# Altium PCB Pcb.PcbDoc
Units mm, origin at the board's own origin, x right, y up, seen from the top; angles counter-clockwise.
Board outline 60 x 69 mm, 2 copper layers (Top Layer, Bottom Layer), stack 1.98 mm thick; 15 components, 9 nets, 50 pads, 3 vias.
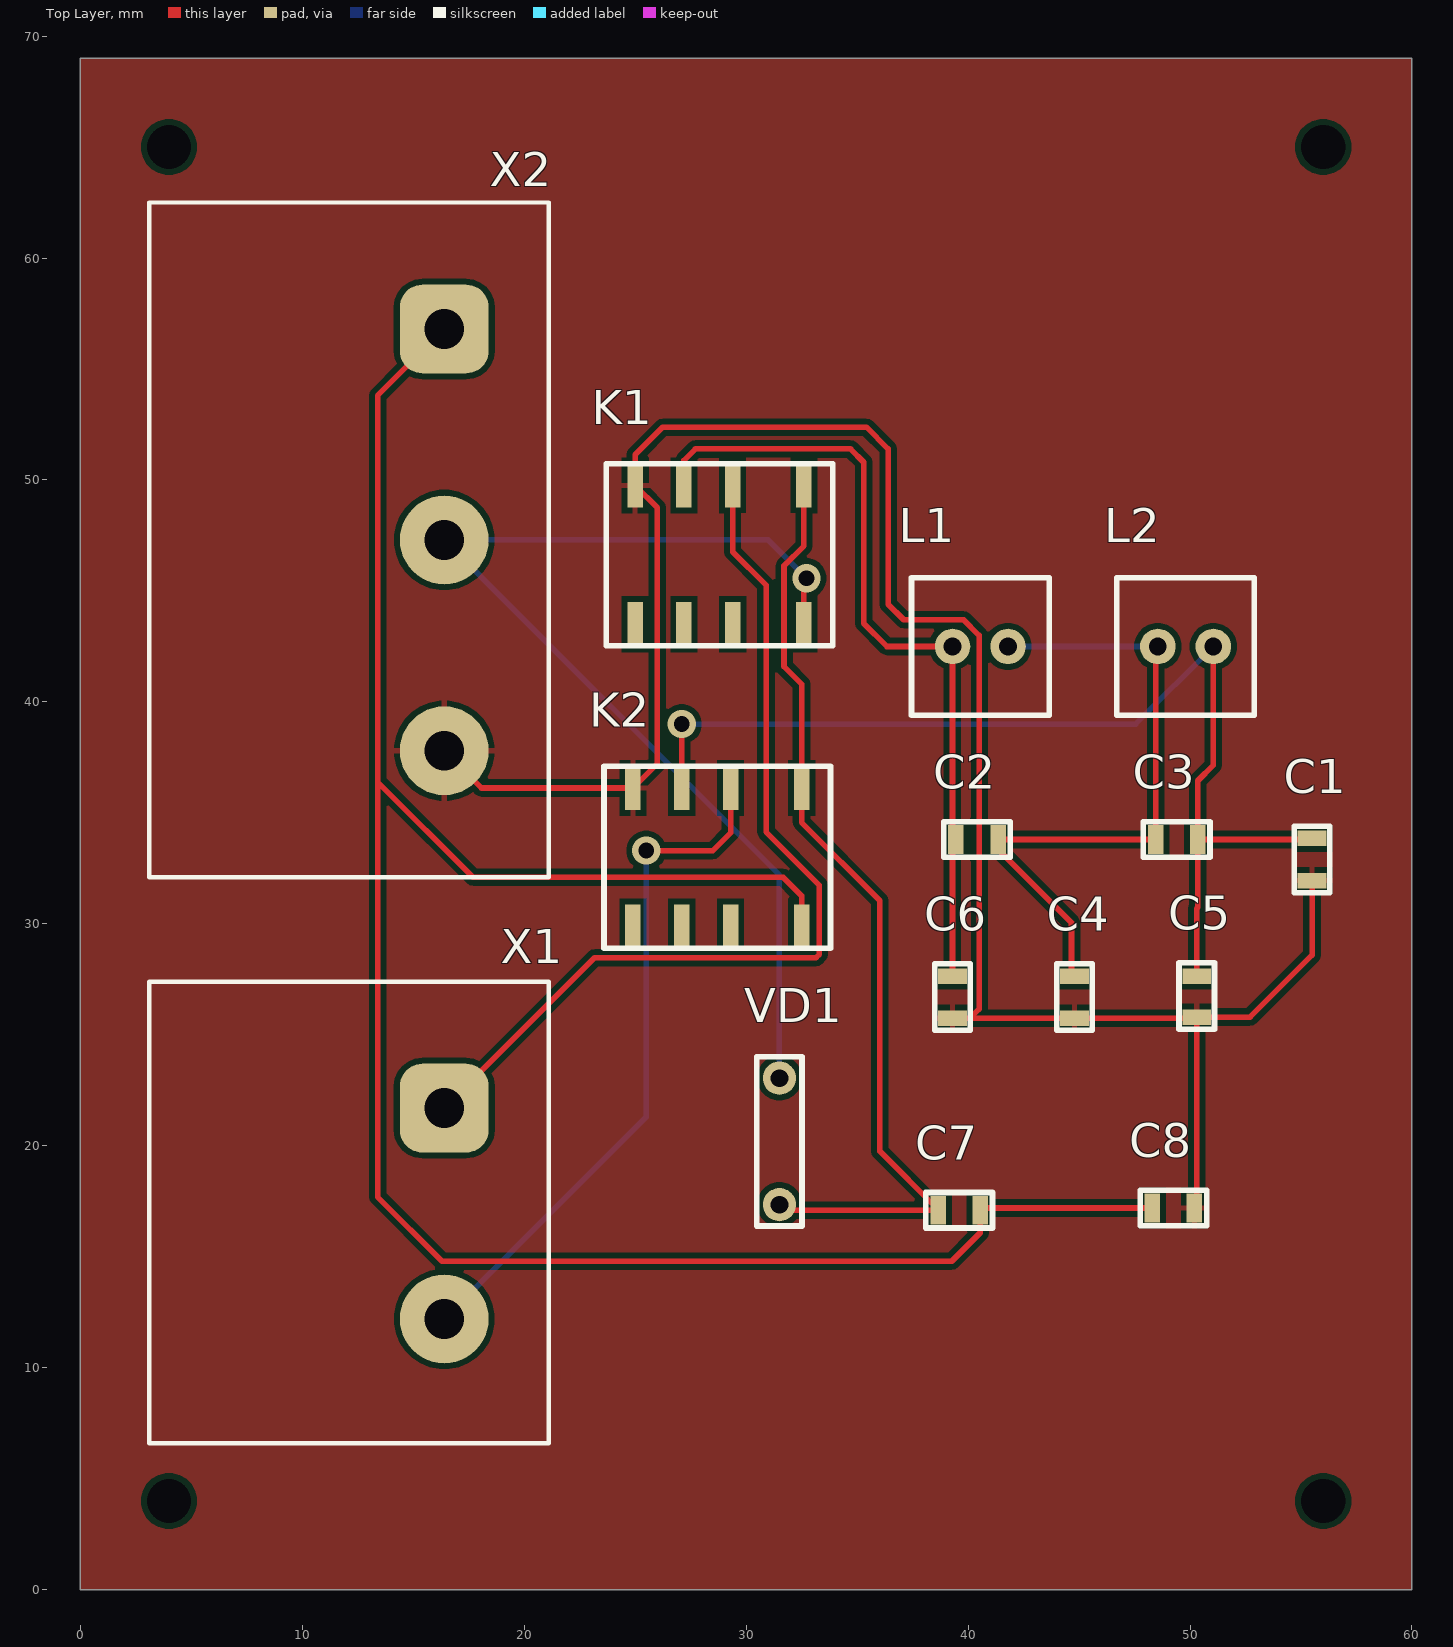
[diagram p0: Top Layer view]
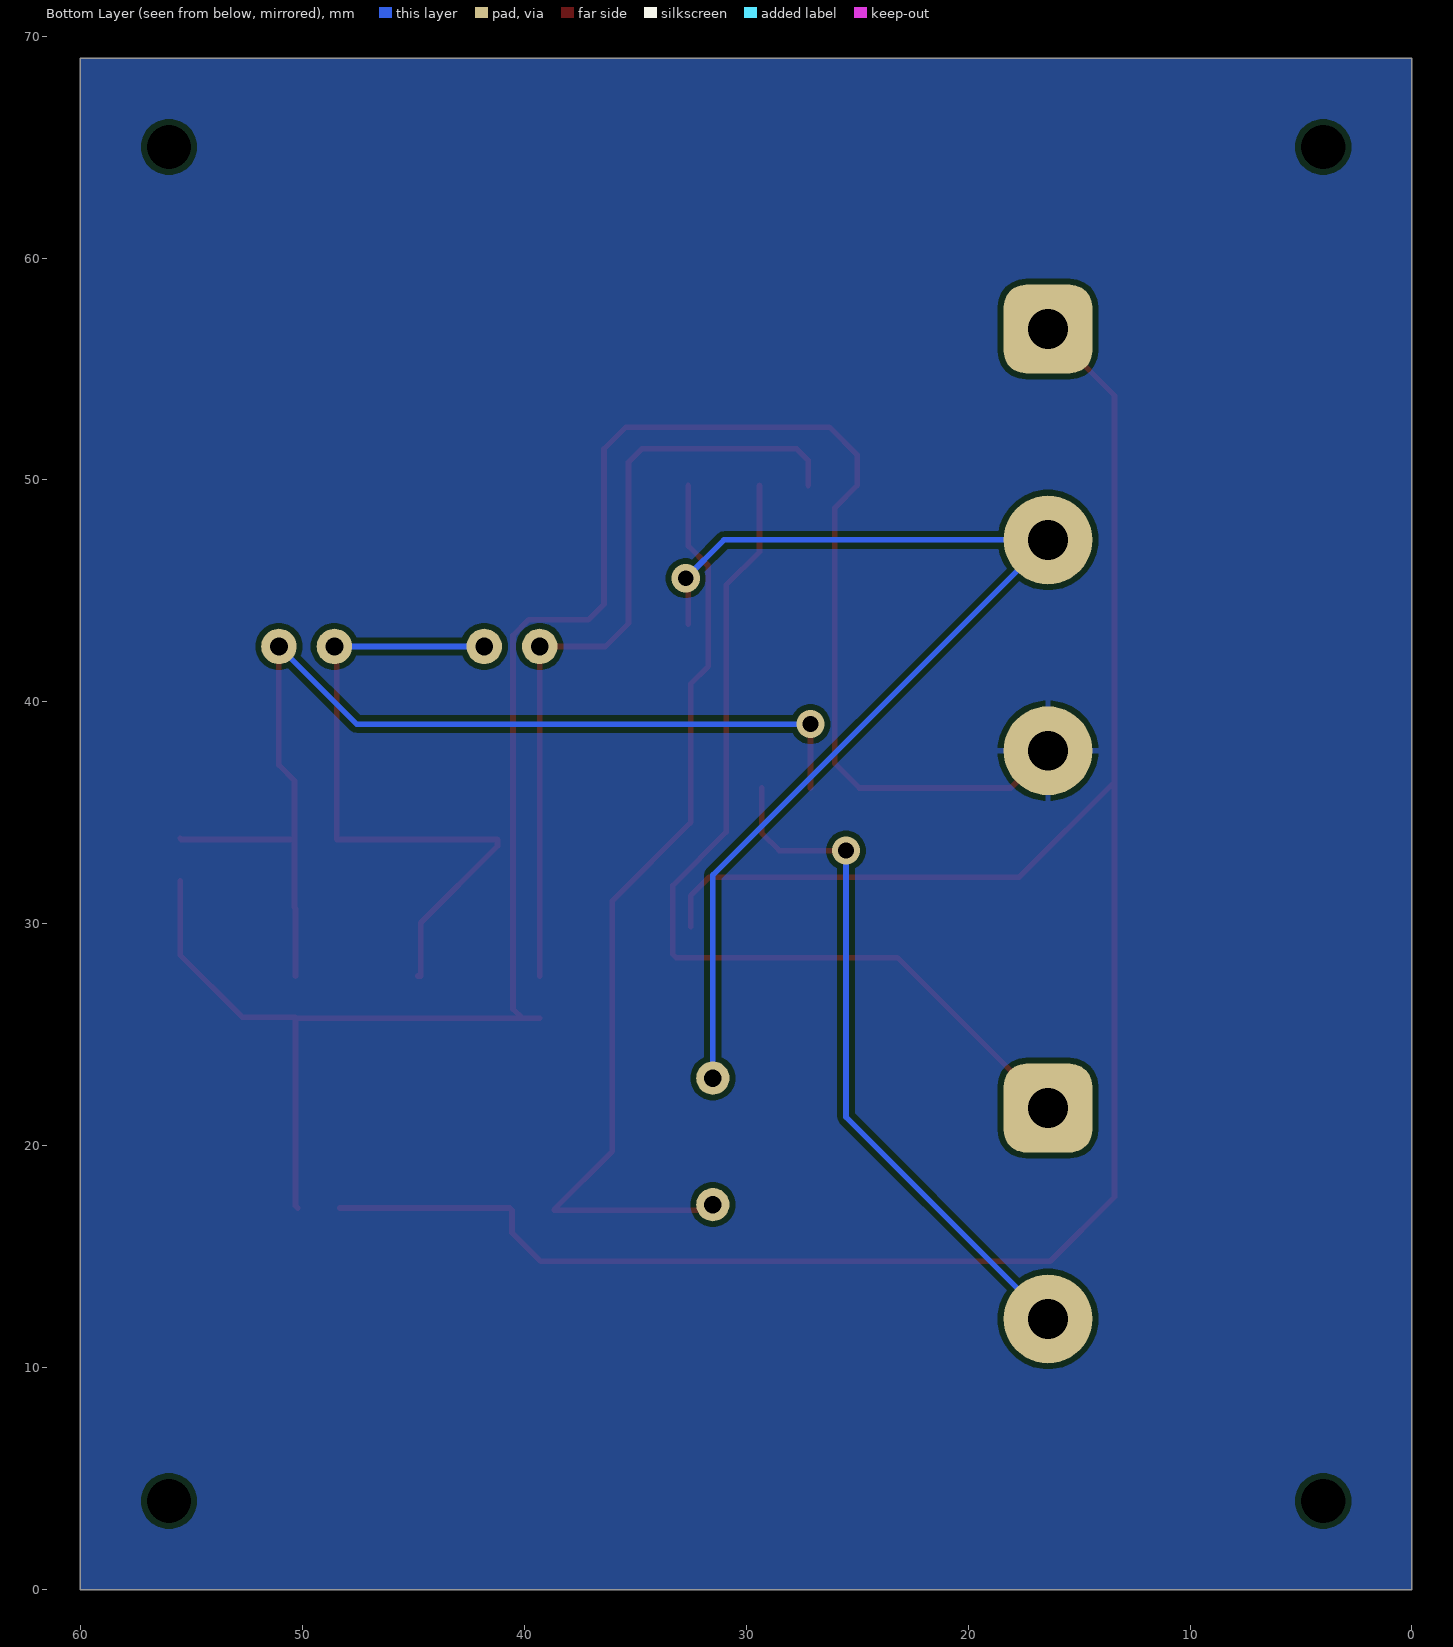
[diagram p1: Bottom Layer view, seen from below]
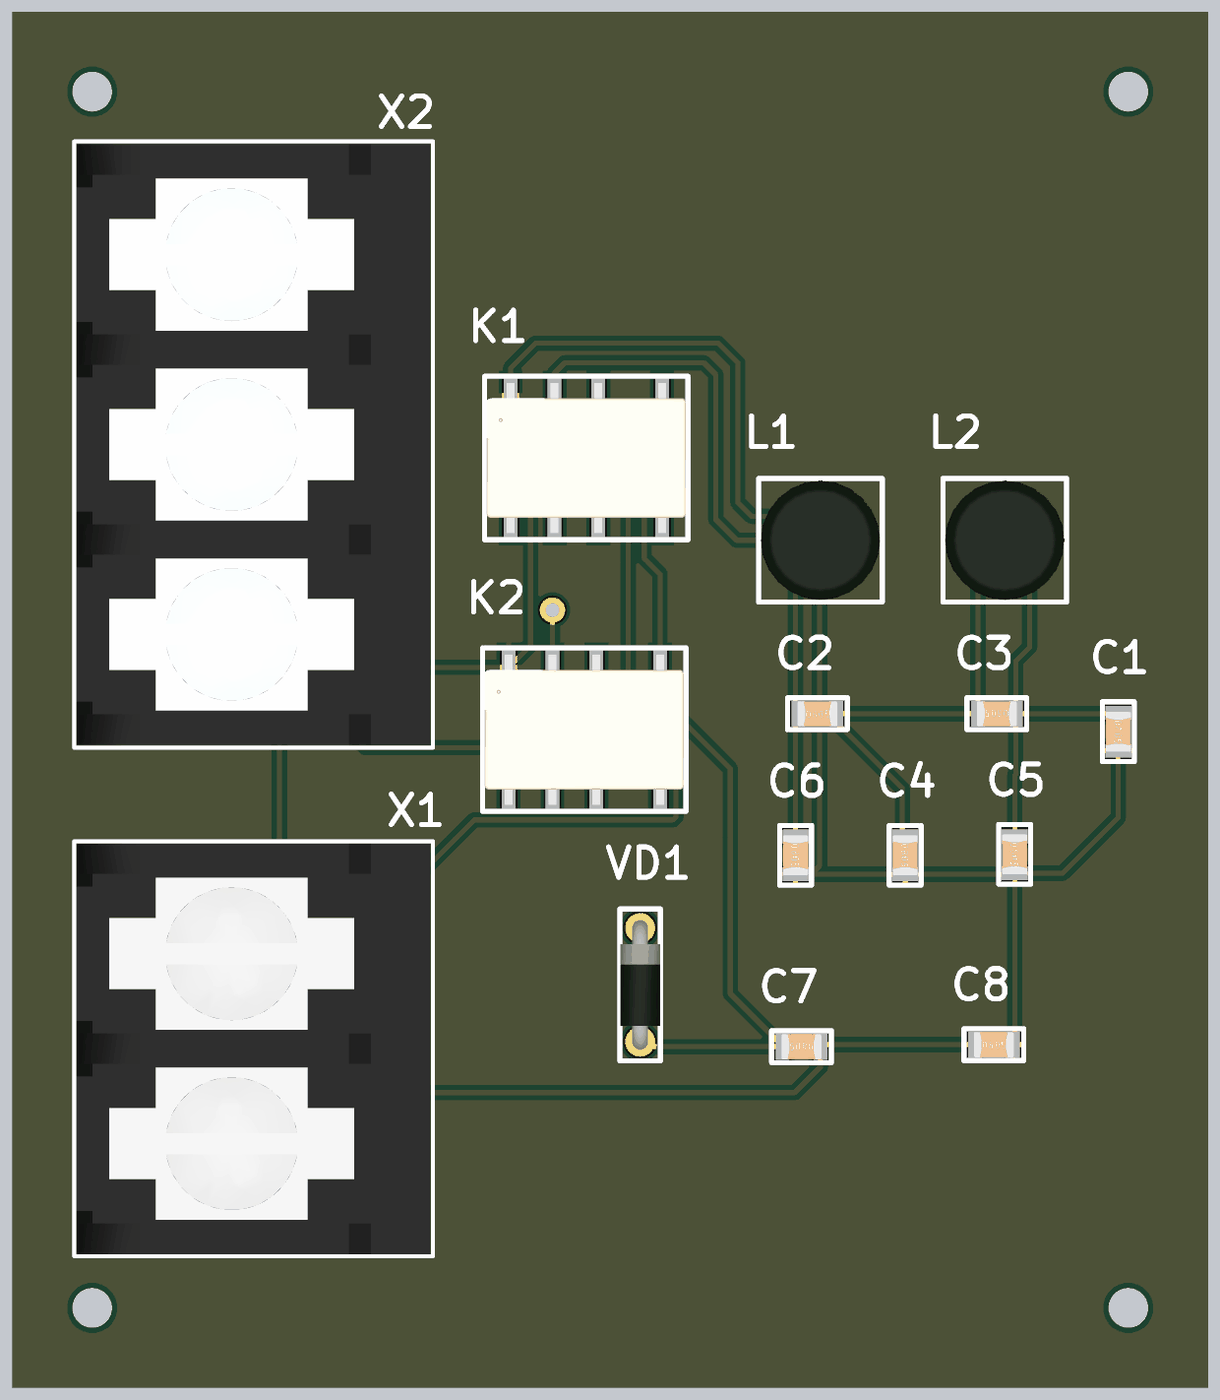
[diagram p2: 3D render of the assembled board from above, using the file's embedded part models]

## Layer stack, top to bottom
Top Solder: solder mask 0.0102, Solder Resist, Dk 3.5
Top Layer: signal copper 0.0356
Dielectric 1: dielectric 1.9086, FR-4, Dk 4.8
Bottom Layer: signal copper 0.0356
Bottom Solder: solder mask 0.0102, Solder Resist, Dk 3.5

## Board outline
0,0 0,69 60,69 60,0

## Design rules (kind name [scope] priority, off if disabled: settings)
Clearance [All] p1: gap=0.254 ignorepadtopadclearanceinfootprint=FALSE except(0: Arc-Hole Track-Hole SMDPad-Hole THPad-Hole Via-Hole Fill-Hole Poly-Hole Region-Hole Text-Hole)
PolygonConnect [All] p1: connectstyle=Relief reliefconductorwidth=0.254 reliefentries=4 polygonreliefangle="90 Angle" airgapwidth=0.254
RoutingVias [All] p1: holewidth=0.711 width=1.27 viastyle="Through Hole" minholewidth=0.711 minwidth=1.27 maxholewidth=0.711 maxwidth=1.27
SolderMaskExpansion [All] p1: expansion=0.102 istentingtop=FALSE
Width [All] p1: maxlimit=0.254 minlimit=0.254 preferedwidth=0.254
30 further rules are at their usual default settings.

## Components (designator, comment, footprint, x,y, rotation, side; value= is the part's Value field where it differs from the comment)
C1 "10пФ-5%-50В-0805" CAPAC_0805C#1 55.5,32.9 r90 top
C2 "110пФ-5%-50В-0805" CAPAC_0805C#1 40.4,33.8 r180 top
C3 "36пФ-5%-50В-0805" CAPAC_0805C#1 49.4,33.8 r0 top
C4 "680пФ-10%-50В-0805" CAPAC_0805C#1 44.8,26.7 r90 top
C5 "360пФ-5%-50В-0805" CAPAC_0805C#2 50.3,26.75 r90 top
C6 "330пФ-5%-50В-0805" CAPAC_0805C#1 39.3,26.7 r90 top
C7 "0.1мкФ-10%-50В-0805" CAPAC_0805C#1 39.6,17.1 r0 top
C8 "0.1мкФ-10%-50В-0805" CAPAC_0805C#1 49.25,17.2 r180 top
K1 "1-1462037-4 (IM03GR)" RELAY_IM03GR 28.8,46.625 r180 top
K2 "1-1462037-4 (IM03GR)" RELAY_IM03GR 28.7,33 r180 top
L1 "1.11мГн-0.3А-6x8" INDUCTOR_6x8 40.55,42.5 r0 top
L2 "1.32мГн-0.3А-6x8" INDUCTOR_6x8 49.8,42.5 r0 top
VD1 "1N4007" DIODE_DO-41 31.5,20.2 r90 top
X1 "6PCV-02-1395" CON_6PCV-02-006 16.4,21.7 r270 top
X2 "6PCV-03-007" CON_6PCV-03-006 16.4,56.8 r270 top

## Footprints (in the part's own frame and the unit in brackets; to place one, negate y for a bottom-side part, rotate by r counter-clockwise, add the part's x,y. Pads: shape width x height; smd on the part's side, far side on the other; paste and mask are expansions set on the pad)
CAPAC_0805C#1 [mm]
  rect 0.7x1.3 smd: 0(-0.95,0) 1(0.95,0)
  silkscreen extent -1.5,-0.8 1.5,0.8, body extent -1,-0.63 1,0.63, height 1.3
CAPAC_0805C#2 [mm]
  rect 0.7x1.3 smd: 0(-0.95,0) 1(0.9,0)
  silkscreen extent -1.5,-0.8 1.5,0.8, body extent -1,-0.63 1,0.63, height 1.3
CON_6PCV-02-006 [mm]
  rrect50% 4x4 hole 1.8: 1(0,0)
  round 4 hole 1.8: 2(9.5,0)
  round 0.5 on Top Overlay: ""(-5,4)
  round 0.5 on Mech1: ""(-5,4)
  silkscreen extent -5.7,-13.3 15.1,4.7, body extent -5.6,-13.2 15,4.58, height 15.96
CON_6PCV-03-006 [mm]
  rrect50% 4x4 hole 1.8: 1(0,0)
  round 4 hole 1.8: 2(9.5,0) 3(19,0)
  round 0.5 on Top Overlay: ""(-5,4)
  silkscreen extent -5.7,-13.3 24.7,4.7, body extent -5.56,-13.2 24.56,4.58, height 15.96
DIODE_DO-41 [mm]
  round 1.5 hole 0.8: 0(-2.85,0) 1(2.85,0)
  silkscreen extent -3.81,-1.02 3.81,1.02, body extent -3.25,-1 3.25,1, height 11
INDUCTOR_6x8 [mm]
  round 1.6 hole 0.8: 0(-1.25,0) 1(1.25,0)
  silkscreen extent -3.1,-3.1 3.1,3.1, body extent -3,-3 3,3, height 20
RELAY_IM03GR [mm]
  rect 0.7x2 smd: 1(-3.8,-3.125) 2(-0.6,-3.125) 3(1.6,-3.125) 4(3.8,-3.125) 5(3.8,3.125) 6(1.6,3.125) 7(-0.6,3.125) 8(-3.8,3.125)
  silkscreen extent -5.1,-4.1 5.1,4.1, body extent -5,-3.76 5,3.76, height 5.65

## Part data
C1: library part Capac_0805C, Manufacturer="Murata Electronics", PartNumber=GRM2165C1H100JZ01D, Href=https://www.chipdip.ru/product/grm2165c1h100j, Kind=Capacitor
C2: library part Capac_0805C, Manufacturer=Тайвань, PartNumber=MLCC110pFNPO50V5%0805, Href=https://www.chipdip.ru/product0/636411021, Kind=Capacitor
C3 C5: library part Capac_0805C, Manufacturer="Murata Electronics", PartNumber=GRM2165C1H360JZ01D, Href=https://www.chipdip.ru/product/grm2165c1h360j, Kind=Capacitor
C4: library part Capac_0805C, Manufacturer="Murata Electronics", PartNumber=GRM216R71H681KA01D, Href=https://www.chipdip.ru/product/grm216r71h681k, Kind=Capacitor
C6: library part Capac_0805C, Manufacturer="Murata Electronics", PartNumber=GRM2165C1H331JA01D, Href=https://www.chipdip.ru/product/grm2165c1h331j, Kind=Capacitor
C7 C8: library part Capac_0805C, Manufacturer="Murata Electronics", PartNumber=GRM21BR71H104KA01L, Href=https://www.chipdip.ru/product/grm21br71h104k, Kind=Capacitor
K1 K2: library part Realy_IM03GR, Manufacturer="TE Connectivity", Href=https://www.chipdip.ru/product/1-1462037-4-im03gr, Kind=Relay, PartNumber="1-1462037-4 (IM03GR)"
L1 L2: library part Induc_0805I, Manufacturer=QBYDIY, Href=https://aliexpress.ru/item/1005004542825940.html?spm=a2g2w.productlist.rcmdprod.0.e96d59dfPlHqNd&sku_id=12000029543884035, Kind=Inductor
VD1: library part Diode, Manufacturer="Diotec Semiconductor", Href=https://www.chipdip.ru/product/1n4007, Kind=Diode, PartNumber=1N4007
X1: library part Con_2, Manufacturer="TE Connectivity", Href=https://www.chipdip.ru/product0/8004913421, Kind=Connector, PartNumber=6PCV-02-1395
X2: library part Con_3, Manufacturer="TE Connectivity", Href=https://www.chipdip.ru/product0/8005967819, Kind=Connector, PartNumber=6PCV-03-007

## Free pads (board coordinates)
  round 0 hole 2 unplated: 17(4,4) 17(4,65) 17(56,4) 17(56,65)

## Via types
v1: diameter 1.27, hole 0.711, Top Layer to Bottom Layer, 3 vias

## Nets (pads, with @x,y where several pads share a name; then routed paths per layer and width w, separated by ;. In a path a pad name is that pad's centre, name@x,y a point inside that pad or via, vN(x,y) a via of type N, cw(c..) or ccw(c..) an arc to the next point about the centre after c; other vN are vias at no path point)
GND: C1.0 C4.0 C5.0 C6.0 C8.0 K1.4 K2.4 X2.3 | length 95.9
  Top Layer w0.254: X2.3 18.075,36.125 K2.4 26,37.225 26,48.75 K1.4 25,51.136 26.245,52.381 35.419,52.381 36.4,51.4 36.4,44.4 37.1,43.7 39.8,43.7 40.5,43 40.5,26.162 40.088,25.75 ; C6.0 40.088,25.75 ; C8.0 50.3,17.3 C5.0 ; C1.0 55.5,28.6 52.7,25.8 C5.0 ; 40.088,25.75 C4.0 50.25,25.75 C5.0
NetC1_1: C1.1 C3.1 C5.1 K2.3 L2.1 | length 48.6
  Top Layer w0.254: K2.3 v1(27.1,39) ; C5.1 50.3,30.689 50.35,30.739 C3.1 ; L2.1 51.05,37.15 50.35,36.45 C3.1 ; C1.1 55.45,33.8 C3.1
  Bottom Layer w0.254: v1(27.1,39) 47.55,39 L2.1
NetC2_0: C2.0 C3.0 C4.1 L1.1 L2.0 | length 30.5
  Top Layer w0.254: C4.1 44.66,27.65 44.66,30.048 41.2,33.508 41.2,33.8 C3.0 48.45,42.4 L2.0
  Bottom Layer w0.254: L1.1 L2.0
NetC2_1: C2.1 C6.1 K1.3 L1.0 | length 36.2
  Top Layer w0.254: K1.3 27.2,50.882 27.718,51.4 34.7,51.4 35.3,50.8 35.3,43.54 36.34,42.5 L1.0 39.3,33.8 C6.1
NetC7_0: C7.0 K1.1 K2.1 VD1.0 | length 42.3
  Top Layer w0.254: VD1.0@32.2,17.1 C7.0 38.65,17.131 36.024,19.757 36.024,31.045 32.5,34.569 K2.1 32.5,40.8 31.706,41.594 31.706,46.132 32.6,47.026 K1.1
NetC7_1: C7.1 C8.1 K2.8 X2.1 | length 100.7
  Top Layer w0.254: X2.1 13.4,53.8 13.4,36.4 ; K2.8 32.5,31.267 31.667,32.1 17.7,32.1 13.4,36.4 ; C8.1 40.65,17.2 C7.1 40.55,16.084 39.266,14.8 16.3,14.8 13.4,17.7 13.4,36.4
NetK1_2: K1.2 X1.1 | length 42.5
  Top Layer w0.254: X1.1 23.179,28.479 33.151,28.479 33.3,28.628 33.3,31.737 30.9,34.137 30.9,45.262 29.4,46.762 K1.2
NetK1_8: K1.8 VD1.1 X2.2 | length 49.7
  Top Layer w0.254: K1.8 32.6,45.451 v1(32.722,45.573)
  Bottom Layer w0.254: VD1.1 31.5,32.2 X2.2 30.995,47.3 v1(32.722,45.573)
NetK2_2: K2.2 X1.2 | length 31
  Top Layer w0.254: v1(25.5,33.3) 28.5,33.3 29.3,34.1 K2.2
  Bottom Layer w0.254: X1.2 25.5,21.3 v1(25.5,33.3)
pads on no net: K1.5 K1.6 K1.7 K2.5 K2.6 K2.7 X1. X2.

## Polygon pours and split planes (outlines as drawn)
GND on Top Layer "GND_L01_P000" (solid, pour order 0): 0,69 60,69 60,0 0,0
GND on Bottom Layer "GND_L02_P001" (solid, pour order 1): 0,69 60,69 60,0 0,0

## Text inside footprints (layer, text, board x,y; h text height)
X1: Mechanical 1 "2" at 12.8,12.5 h2 r270; Mechanical 1 "1" at 12.8,21.9 h2 r270
X2: Mechanical 1 "1" at 12.8,57 h2 r270; Mechanical 1 "2" at 12.8,47.6 h2 r270; Mechanical 1 "3" at 12.8,38 h2 r270